# EAGLE board avoccado-nora2-test-jig-panel-50x50 (EAGLE 7.2.0)
Avoccado-avr-yolandi Yolandi is the minified version of Avoccado-avr with less pins broken out and a footprint of less than one square inch for the PCB without peripherals.
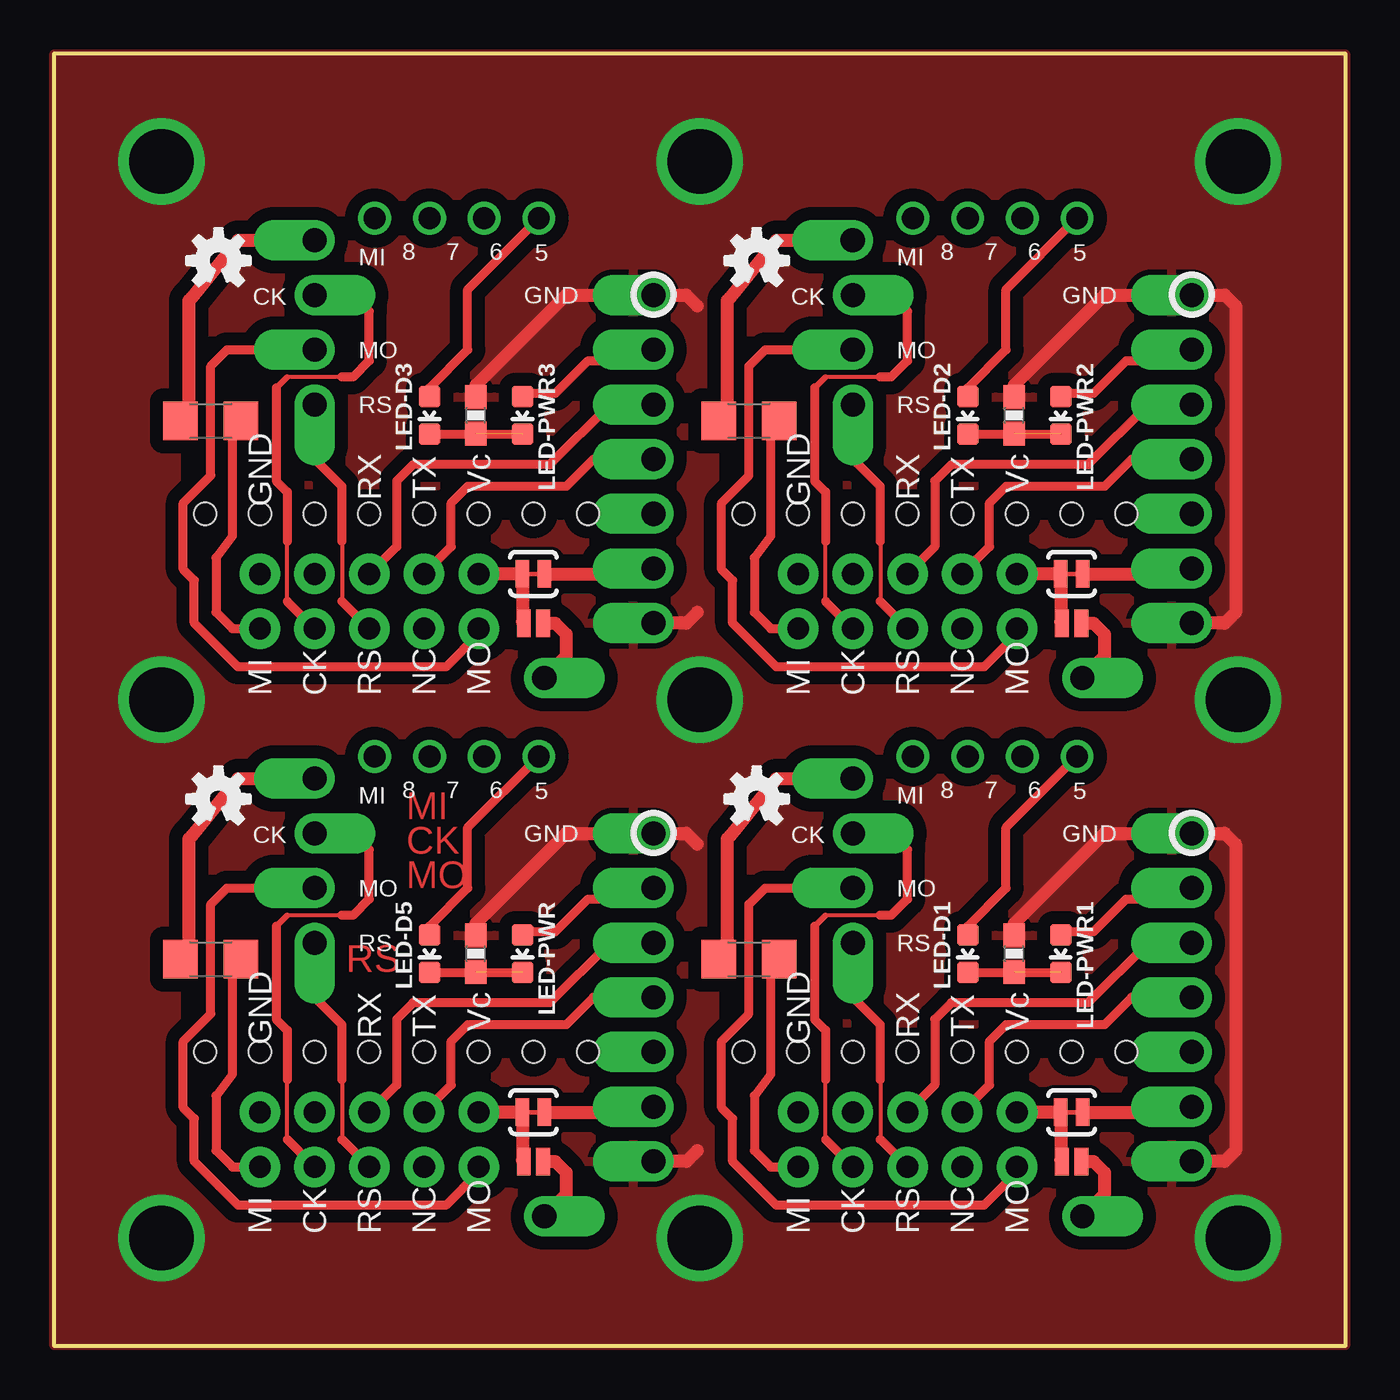
[diagram p0: board, top side]
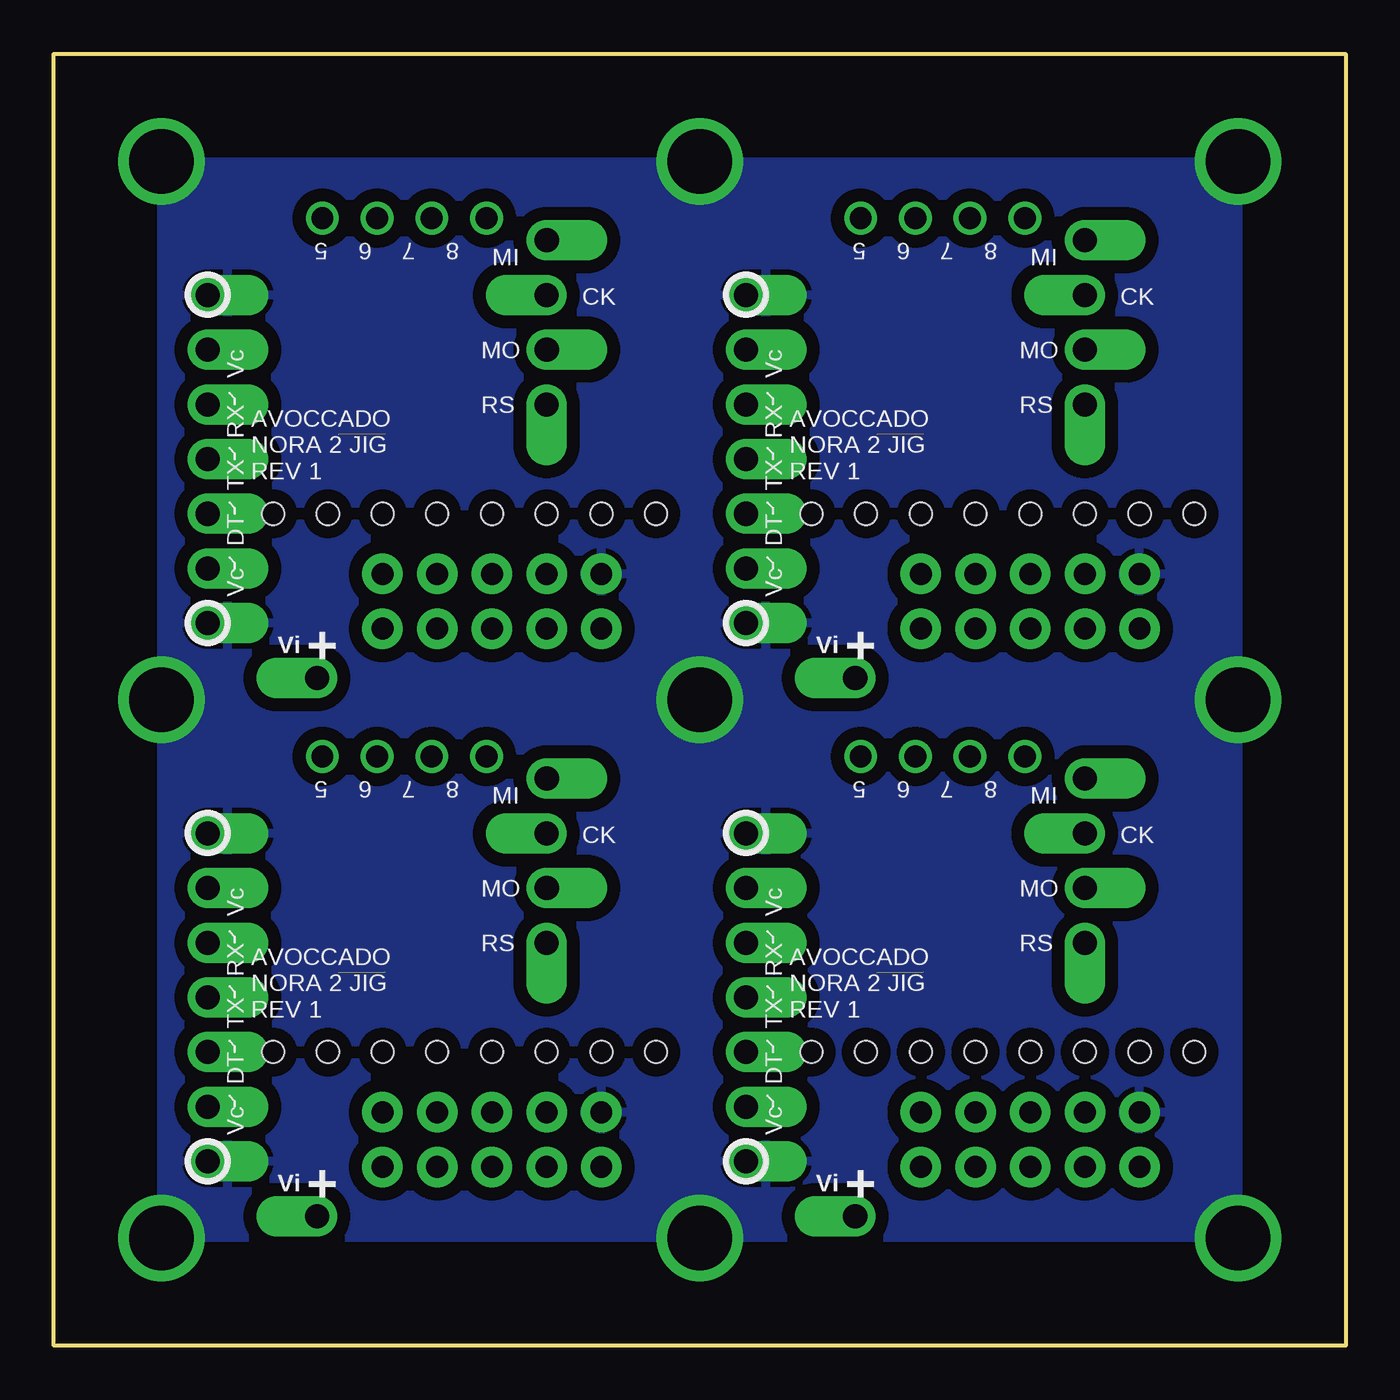
[diagram p1: board, bottom side, seen from below]

Size 60 x 60 mm. Coordinates in mm from the lower left corner, seen from the top.
Outline: 0,60 0,0 60,0 60,60 0,60
Copper layers (1*16): Top 0.035mm / dielectric 1.5mm / Bottom 0.035mm
Design rules "dirt_cheap_dirty_boards.v1 *": minimum track width 5mil, minimum drill 12mil, track to track 5mil, track to pad 5mil, pad to pad 5mil, via to via 5mil, smd to smd 0mil, copper to edge 0mil, drill to drill 10mil, minimum pad ring 10mil, minimum via ring 6mil, stop-mask expansion 0mil, vias tented up to drill 25mil, thermal gap 10mil
Net classes: 1 vcc: width 0.254 mm; 3 usbvcc: width 0.203 mm, drill 0.61 mm, clearance 0.152 mm
Holes 1.02 mm at 9.57,13.64 12.11,13.64 14.65,13.64 17.19,13.64 19.73,13.64 22.27,13.64 24.81,13.64 7.03,13.64 34.57,13.64 37.11,13.64 39.65,13.64 42.19,13.64 44.73,13.64 47.27,13.64 49.81,13.64 32.03,13.64 34.57,38.64 37.11,38.64 39.65,38.64 42.19,38.64 44.73,38.64 47.27,38.64 49.81,38.64 32.03,38.64 9.57,38.64 12.11,38.64 14.65,38.64 17.19,38.64 19.73,38.64 22.27,38.64 24.81,38.64 7.03,38.64
tRestrict: area 8,8 to 19.7,12.1; area 12.1,14.1 to 17.7,26.3; area 17.7,24.8 to 19.7,26.3; area 6.5,8.6 to 10.1,20.7; area 33,8 to 44.7,12.1; area 31.5,8.6 to 35.1,20.7; area 33,33 to 44.7,37.1; area 31.5,33.6 to 35.1,45.7; area 8,33 to 19.7,37.1; area 6.5,33.6 to 10.1,45.7

## Footprints (pad centres in the part's own frame; a part is rotated, then mirrored left to right if it is on the bottom)
2X5_NOSILK = drill 1.016 pad 1.88: 1 -1.27,5.08; 2 1.27,5.08; 3 -1.27,2.54; 4 1.27,2.54; 5 -1.27,0; 6 1.27,0; 7 -1.27,-2.54; 8 1.27,-2.54; 9 -1.27,-5.08; 10 1.27,-5.08
1X01_OFFSET = drill 1.118 pad 1.88 offset: 1 0,0
LED-0603 = smd 1 x 1: A 0,-0.877; C 0,0.877
1206 = smd 1.6 x 1.8: 1 -1.4,0; 2 1.4,0
0603-RES = smd 1.1 x 1: 1 -0.85,0; 2 0.85,0
PAD-JUMPER-2-NC_BY_TRACE_YES_SILK = smd 0.635 x 1.27: 1 -0.508,0; 2 0.508,0
PAD-JUMPER-2-NO_NO_SILK = smd 0.635 x 1.27: 1 -0.45,0; 2 0.45,0
1X01NS-KIT = drill 1.016 pad 1.524: 1 0,0

## Placement (x,y rotation side)
ICSP  M05X2NO_SILK  [2X5_NOSILK]  14.65,9.57 90 bottom
ICSP1  M05X2NO_SILK  [2X5_NOSILK]  39.65,9.57 90 bottom
ICSP2  M05X2NO_SILK  [2X5_NOSILK]  39.65,34.57 90 bottom
ICSP3  M05X2NO_SILK  [2X5_NOSILK]  14.65,34.57 90 bottom
JP1  M01OFFSET  [1X01_OFFSET]  27.86,8.56 90 top
JP2  M01OFFSET  [1X01_OFFSET]  27.86,18.72 90 top
JP3  M01OFFSET  [1X01_OFFSET]  37.1,26.34 90 top
JP4  M01OFFSET  [1X01_OFFSET]  27.86,16.18 90 top
JP5  M01OFFSET  [1X01_OFFSET]  27.86,13.64 90 top
JP6  M01OFFSET  [1X01_OFFSET]  37.12,23.8 270 top
JP7  M01OFFSET  [1X01_OFFSET]  27.86,21.26 90 top
JP8  M01OFFSET  [1X01_OFFSET]  37.1,21.26 90 top
JP9  M01OFFSET  [1X01_OFFSET]  37.11,18.71 180 top
JP10  M01OFFSET  [1X01_OFFSET]  52.86,8.56 90 top
JP11  M01OFFSET  [1X01_OFFSET]  52.86,18.72 90 top
JP12  M01OFFSET  [1X01_OFFSET]  12.1,26.34 90 top
JP13  M01OFFSET  [1X01_OFFSET]  12.12,23.8 270 top
JP14  M01OFFSET  [1X01_OFFSET]  12.1,21.26 90 top
JP15  M01OFFSET  [1X01_OFFSET]  12.11,18.71 180 top
JP16  M01OFFSET  [1X01_OFFSET]  22.78,6.02 270 top
JP17  M01OFFSET  [1X01_OFFSET]  52.86,16.18 90 top
JP18  M01OFFSET  [1X01_OFFSET]  52.86,13.64 90 top
JP19  M01OFFSET  [1X01_OFFSET]  27.86,11.1 90 top
JP20  M01OFFSET  [1X01_OFFSET]  27.86,23.8 90 top
JP21  M01OFFSET  [1X01_OFFSET]  52.86,21.26 90 top
JP22  M01OFFSET  [1X01_OFFSET]  47.78,6.02 270 top
JP23  M01OFFSET  [1X01_OFFSET]  52.86,11.1 90 top
JP24  M01OFFSET  [1X01_OFFSET]  52.86,23.8 90 top
JP25  M01OFFSET  [1X01_OFFSET]  37.1,51.34 90 top
JP26  M01OFFSET  [1X01_OFFSET]  37.12,48.8 270 top
JP27  M01OFFSET  [1X01_OFFSET]  37.1,46.26 90 top
JP28  M01OFFSET  [1X01_OFFSET]  37.11,43.71 180 top
JP29  M01OFFSET  [1X01_OFFSET]  52.86,33.56 90 top
JP30  M01OFFSET  [1X01_OFFSET]  52.86,43.72 90 top
JP31  M01OFFSET  [1X01_OFFSET]  52.86,41.18 90 top
JP32  M01OFFSET  [1X01_OFFSET]  52.86,38.64 90 top
JP33  M01OFFSET  [1X01_OFFSET]  52.86,46.26 90 top
JP34  M01OFFSET  [1X01_OFFSET]  47.78,31.02 270 top
JP35  M01OFFSET  [1X01_OFFSET]  52.86,36.1 90 top
JP36  M01OFFSET  [1X01_OFFSET]  52.86,48.8 90 top
JP37  M01OFFSET  [1X01_OFFSET]  12.1,51.34 90 top
JP38  M01OFFSET  [1X01_OFFSET]  12.12,48.8 270 top
JP39  M01OFFSET  [1X01_OFFSET]  12.1,46.26 90 top
JP40  M01OFFSET  [1X01_OFFSET]  12.11,43.71 180 top
JP41  M01OFFSET  [1X01_OFFSET]  27.86,33.56 90 top
JP42  M01OFFSET  [1X01_OFFSET]  27.86,43.72 90 top
JP43  M01OFFSET  [1X01_OFFSET]  27.86,41.18 90 top
JP44  M01OFFSET  [1X01_OFFSET]  27.86,38.64 90 top
JP45  M01OFFSET  [1X01_OFFSET]  27.86,46.26 90 top
JP46  M01OFFSET  [1X01_OFFSET]  22.78,31.02 270 top
JP47  M01OFFSET  [1X01_OFFSET]  27.86,36.1 90 top
JP48  M01OFFSET  [1X01_OFFSET]  27.86,48.8 90 top
LED-D1  [LED-0603]  42.45,18.21 180 top
LED-D2  [LED-0603]  42.45,43.21 180 top
LED-D3  [LED-0603]  17.45,43.21 180 top
LED-D5  [LED-0603]  17.45,18.21 180 top
LED-PWR  [LED-0603]  21.76,18.21 180 top
LED-PWR1  [LED-0603]  46.76,18.21 180 top
LED-PWR2  [LED-0603]  46.76,43.21 180 top
LED-PWR3  [LED-0603]  21.76,43.21 180 top
LOGO1  OSHW-LOGOS  [OSHW-LOGO-S]  32.65,25.39 0 top
LOGO2  OSHW-LOGOS  [OSHW-LOGO-S]  7.65,25.39 0 top
LOGO3  OSHW-LOGOS  [OSHW-LOGO-S]  32.65,50.39 0 top
LOGO4  OSHW-LOGOS  [OSHW-LOGO-S]  7.65,50.39 0 top
R1  0  [1206]  7.29,17.95 0 top
R2  1K  [0603-RES]  19.61,18.21 90 top
R3  0  [1206]  32.29,17.95 0 top
R4  1K  [0603-RES]  44.6,18.21 90 top
R5  0  [1206]  32.29,42.95 0 top
R6  1K  [0603-RES]  44.6,43.21 90 top
R7  0  [1206]  7.29,42.95 0 top
R8  1K  [0603-RES]  19.61,43.21 90 top
SJ1  JUMPER-PAD-2-NC_BY_TRACE  [PAD-JUMPER-2-NC_BY_TRACE_YES_SILK]  22.27,10.84 180 top
SJ2  JUMPER-PAD-2-NO  [PAD-JUMPER-2-NO_NO_SILK]  22.27,8.56 180 top
SJ3  JUMPER-PAD-2-NC_BY_TRACE  [PAD-JUMPER-2-NC_BY_TRACE_YES_SILK]  47.27,10.84 180 top
SJ4  JUMPER-PAD-2-NO  [PAD-JUMPER-2-NO_NO_SILK]  47.27,8.56 180 top
SJ5  JUMPER-PAD-2-NC_BY_TRACE  [PAD-JUMPER-2-NC_BY_TRACE_YES_SILK]  47.27,35.84 180 top
SJ6  JUMPER-PAD-2-NO  [PAD-JUMPER-2-NO_NO_SILK]  47.27,33.56 180 top
SJ7  JUMPER-PAD-2-NC_BY_TRACE  [PAD-JUMPER-2-NC_BY_TRACE_YES_SILK]  22.27,35.84 180 top
SJ8  JUMPER-PAD-2-NO  [PAD-JUMPER-2-NO_NO_SILK]  22.27,33.56 180 top
TP1  M01NOSILK-KIT  [1X01NS-KIT]  22.53,27.36 270 top
TP2  M01NOSILK-KIT  [1X01NS-KIT]  47.53,27.36 270 top
TP3  M01NOSILK-KIT  [1X01NS-KIT]  44.99,27.36 270 top
TP4  M01NOSILK-KIT  [1X01NS-KIT]  42.45,27.36 270 top
TP5  M01NOSILK-KIT  [1X01NS-KIT]  39.91,27.36 270 top
TP6  M01NOSILK-KIT  [1X01NS-KIT]  19.99,27.36 270 top
TP7  M01NOSILK-KIT  [1X01NS-KIT]  17.45,27.36 270 top
TP8  M01NOSILK-KIT  [1X01NS-KIT]  14.91,27.36 270 top
TP9  M01NOSILK-KIT  [1X01NS-KIT]  47.53,52.36 270 top
TP10  M01NOSILK-KIT  [1X01NS-KIT]  44.99,52.36 270 top
TP11  M01NOSILK-KIT  [1X01NS-KIT]  42.45,52.36 270 top
TP12  M01NOSILK-KIT  [1X01NS-KIT]  39.91,52.36 270 top
TP13  M01NOSILK-KIT  [1X01NS-KIT]  22.53,52.36 270 top
TP14  M01NOSILK-KIT  [1X01NS-KIT]  19.99,52.36 270 top
TP15  M01NOSILK-KIT  [1X01NS-KIT]  17.45,52.36 270 top
TP16  M01NOSILK-KIT  [1X01NS-KIT]  14.91,52.36 270 top

## Library data of the parts
ICSP ICSP1-ICSP3 JP1-JP48 TP1-TP16 = SparkFun-Connectors
LED-D1-LED-D3 LED-D5 LED-PWR LED-PWR1-LED-PWR3 = SparkFun-LED
LOGO1-LOGO4 = SparkFun-Aesthetics
R1 R3 R5 R7 SJ1-SJ8 = SparkFun-Passives
R2 R4 R6 R8 = SparkFun-Resistors

## Nets
3.3V: JP19.1 SJ1.1
3.3V1: JP23.1 SJ3.1
3.3V2: JP35.1 SJ5.1
3.3V3: JP47.1 SJ7.1
5V: JP16.1 SJ2.1
5V1: JP22.1 SJ4.1
5V2: JP34.1 SJ6.1
5V3: JP46.1 SJ8.1
D1: TP5.1
D2: LED-D1.A TP2.1
D3: TP3.1
D4: TP4.1
D5: LED-D5.A TP1.1
D6: TP6.1
D7: TP7.1
D8: TP8.1
D9: TP12.1
D10: LED-D2.A TP9.1
D11: TP10.1
D12: TP11.1
D13: TP16.1
D14: LED-D3.A TP13.1
D15: TP14.1
D16: TP15.1
DTR: JP5.1
DTR1: JP18.1
DTR2: JP32.1
DTR3: JP44.1
GND [vcc]: ICSP1.10 ICSP2.10 ICSP3.10 ICSP.10 JP1.1 JP10.1 JP20.1 JP24.1 JP29.1 JP36.1 JP41.1 JP48.1 R2.2 R4.2 R6.2 R8.2
MISO: JP12.1 R1.1
MISO1: ICSP.9 R1.2
MISO2: JP3.1 R3.1
MISO3: ICSP1.9 R3.2
MISO4: JP25.1 R5.1
MISO5: ICSP2.9 R5.2
MISO6: JP37.1 R7.1
MISO7: ICSP3.9 R7.2
MOSI: ICSP.1 JP14.1
MOSI1: ICSP1.1 JP8.1
MOSI2: ICSP2.1 JP27.1
MOSI3: ICSP3.1 JP39.1
N$1: LED-D5.C LED-PWR.C R2.1
N$2: JP7.1 LED-PWR.A
N$3: LED-D1.C LED-PWR1.C R4.1
N$4: JP21.1 LED-PWR1.A
N$5: LED-D2.C LED-PWR2.C R6.1
N$6: JP33.1 LED-PWR2.A
N$7: LED-D3.C LED-PWR3.C R8.1
N$8: JP45.1 LED-PWR3.A
RESET: ICSP.5 JP15.1
RESET1: ICSP1.5 JP9.1
RESET2: ICSP2.5 JP28.1
RESET3: ICSP3.5 JP40.1
RXI: ICSP.6 JP2.1
RXI1: ICSP1.6 JP11.1
RXI2: ICSP2.6 JP30.1
RXI3: ICSP3.6 JP42.1
SCK: ICSP.7 JP13.1
SCK1: ICSP1.7 JP6.1
SCK2: ICSP2.7 JP26.1
SCK3: ICSP3.7 JP38.1
TXO: ICSP.4 JP4.1
TXO1: ICSP1.4 JP17.1
TXO2: ICSP2.4 JP31.1
TXO3: ICSP3.4 JP43.1
VTG: ICSP.2 SJ1.2 SJ2.2
VTG1: ICSP1.2 SJ3.2 SJ4.2
VTG2: ICSP2.2 SJ5.2 SJ6.2
VTG3: ICSP3.2 SJ7.2 SJ8.2

## Tracks (layer width: path | path; a pad name or v marks a point on that pad's centre or on a via)
3.3V
  Top 0.406: 27.6,10.84 27.61,10.84 JP19.1
  Top 0.61: SJ1.1 27.6,10.84
3.3V1
  Top 0.406: 52.6,10.84 52.61,10.84 JP23.1
  Top 0.61: SJ3.1 52.6,10.84
3.3V2
  Top 0.406: 52.6,35.84 52.61,35.84 JP35.1
  Top 0.61: SJ5.1 52.6,35.84
3.3V3
  Top 0.406: 27.6,35.84 27.61,35.84 JP47.1
  Top 0.61: SJ7.1 27.6,35.84
5V
  Top 0.406: 23.28,6.52 JP16.1
  Top 0.61: SJ2.1 23.29,8.56 23.8,8.05 23.8,7.03 23.29,6.52 23.28,6.52
5V1
  Top 0.406: 48.28,6.52 JP22.1
  Top 0.61: SJ4.1 48.29,8.56 48.8,8.05 48.8,7.03 48.29,6.52 48.28,6.52
5V2
  Top 0.406: 48.28,31.52 JP34.1
  Top 0.61: SJ6.1 48.29,33.56 48.8,33.05 48.8,32.03 48.29,31.52 48.28,31.52
5V3
  Top 0.406: 23.28,31.52 JP46.1
  Top 0.61: SJ8.1 23.29,33.56 23.8,33.05 23.8,32.03 23.29,31.52 23.28,31.52
D2
  Top 0.406: TP2.1 44.22,24.06 44.22,21.26 42.45,19.48 LED-D1.A
D5
  Top 0.406: TP1.1 19.22,24.06 19.22,21.26 17.45,19.48 LED-D5.A
D10
  Top 0.406: TP9.1 44.22,49.06 44.22,46.26 42.45,44.48 LED-D2.A
D14
  Top 0.406: TP13.1 19.22,49.06 19.22,46.26 17.45,44.48 LED-D3.A
GND  (via drill 3 pad 4)
  Top 0.406: JP20.1 | JP48.1 | JP36.1 | JP24.1
  Top 0.61: R2.2 19.61,19.61 23.8,23.8 JP20.1 29.38,23.8 29.89,23.29 | 29.89,9.06 29.38,8.56 JP1.1 | R8.2 19.61,44.6 23.8,48.8 JP48.1 29.38,48.8 29.89,48.29 | 29.89,34.06 29.38,33.56 JP41.1 | R6.2 44.6,44.6 48.8,48.8 JP36.1 54.38,48.8 54.89,48.29 54.89,34.06 54.38,33.56 JP29.1 | R4.2 44.6,19.61 48.8,23.8 JP24.1 54.38,23.8 54.89,23.29 54.89,9.06 54.38,8.56 JP10.1
  other vias: 30,30 30,55 55,55 55,30 5,55 5,30 5,5 30,5 55,5
  pour Bottom (isolate 0.61): 5.4,28.02 26,28 27.5,26.5 27.5,6 5.4,6
  pour Top (isolate 0.61): 0,0 0,60 60,60 60,0
  pour Bottom (isolate 0.61): 55,5 55,55 5,55 5,5
MISO
  Top 0.61: JP12.1 8.56,26.34 6.39,23.67 6.27,23.54 6.27,18.72 5.89,18.33 R1.1
MISO1
  Top 0.406: ICSP.9 8.3,8.3 7.54,9.06 7.54,11.6 8.3,12.62 8.3,17.45 R1.2
MISO2
  Top 0.61: JP3.1 33.56,26.34 31.39,23.67 31.27,23.54 31.27,18.72 30.89,18.33 R3.1
MISO3
  Top 0.406: ICSP1.9 33.3,8.3 32.54,9.06 32.54,11.6 33.3,12.62 33.3,17.45 R3.2
MISO4
  Top 0.61: JP25.1 33.56,51.34 31.39,48.67 31.27,48.54 31.27,43.72 30.89,43.33 R5.1
MISO5
  Top 0.406: ICSP2.9 33.3,33.3 32.54,34.06 32.54,36.6 33.3,37.62 33.3,42.45 R5.2
MISO6
  Top 0.61: JP37.1 8.56,51.34 6.39,48.67 6.27,48.54 6.27,43.72 5.89,43.33 R7.1
MISO7
  Top 0.406: ICSP3.9 8.3,33.3 7.54,34.06 7.54,36.6 8.3,37.62 8.3,42.45 R7.2
MOSI
  Top 0.406: ICSP.1 19.73,8.05 18.21,6.52 8.56,6.52 6.52,8.56 6.52,10.54 6.02,11.05 6.02,14.14 7.29,15.41 7.29,20.49 8.05,21.26 JP14.1
MOSI1
  Top 0.406: ICSP1.1 44.73,8.05 43.21,6.52 33.56,6.52 31.52,8.56 31.52,10.54 31.02,11.05 31.02,14.14 32.29,15.41 32.29,20.49 33.05,21.26 JP8.1
MOSI2
  Top 0.406: ICSP2.1 44.73,33.05 43.21,31.52 33.56,31.52 31.52,33.56 31.52,35.54 31.02,36.05 31.02,39.14 32.29,40.41 32.29,45.49 33.05,46.26 JP27.1
MOSI3
  Top 0.406: ICSP3.1 19.73,33.05 18.21,31.52 8.56,31.52 6.52,33.56 6.52,35.54 6.02,36.05 6.02,39.14 7.29,40.41 7.29,45.49 8.05,46.26 JP39.1
N$1  (1 unrouted)
  Top 0.406: LED-D5.C LED-PWR.C
N$2
  Top 0.406: JP7.1 27.35,20.75 24.81,20.75 23.29,19.22 21.9,19.22 LED-PWR.A
N$3  (1 unrouted)
  Top 0.406: LED-D1.C LED-PWR1.C
N$4
  Top 0.406: JP21.1 52.35,20.75 49.81,20.75 48.29,19.22 46.9,19.22 LED-PWR1.A
N$5  (1 unrouted)
  Top 0.406: LED-D2.C LED-PWR2.C
N$6
  Top 0.406: JP33.1 52.35,45.75 49.81,45.75 48.29,44.22 46.9,44.22 LED-PWR2.A
N$7  (1 unrouted)
  Top 0.406: LED-D3.C LED-PWR3.C
N$8
  Top 0.406: JP45.1 27.35,45.75 24.81,45.75 23.29,44.22 21.9,44.22 LED-PWR3.A
RESET
  Top 0.19: 13.38,12.37 13.38,9.57
  Top 0.305: JP15.1
  Top 0.406: 13.38,9.57 ICSP.5 | 13.38,12.37 13.38,14.91 12.11,16.18 JP15.1
RESET1
  Top 0.19: 38.38,12.37 38.38,9.57
  Top 0.305: JP9.1
  Top 0.406: 38.38,9.57 ICSP1.5 | 38.38,12.37 38.38,14.91 37.11,16.18 JP9.1
RESET2
  Top 0.19: 38.38,37.37 38.38,34.57
  Top 0.305: JP28.1
  Top 0.406: 38.38,34.57 ICSP2.5 | 38.38,37.37 38.38,39.91 37.11,41.18 JP28.1
RESET3
  Top 0.19: 13.38,37.37 13.38,34.57
  Top 0.305: JP40.1
  Top 0.406: 13.38,34.57 ICSP3.5 | 13.38,37.37 13.38,39.91 12.11,41.18 JP40.1
RXI
  Top 0.406: JP2.1 25.83,18.72 23.03,15.92 16.68,15.92 15.92,15.16 15.92,12.11 ICSP.6
RXI1
  Top 0.406: JP11.1 50.83,18.72 48.03,15.92 41.68,15.92 40.92,15.16 40.92,12.11 ICSP1.6
RXI2
  Top 0.406: JP30.1 50.83,43.72 48.03,40.92 41.68,40.92 40.92,40.16 40.92,37.11 ICSP2.6
RXI3
  Top 0.406: JP42.1 25.83,43.72 23.03,40.92 16.68,40.92 15.92,40.16 15.92,37.11 ICSP3.6
SCK
  Top 0.19: 10.84,9.57 10.84,12.37 | 13.38,19.99 10.84,19.99
  Top 0.254: 10.84,19.99 10.33,19.48
  Top 0.406: 10.84,9.57 ICSP.7 | JP13.1 13.89,23.8 14.65,23.03 14.65,20.75 13.89,19.99 13.38,19.99 | 10.33,19.48 10.33,15.16 10.84,14.65 10.84,12.37
SCK1
  Top 0.19: 35.84,9.57 35.84,12.37 | 38.38,19.99 35.84,19.99
  Top 0.254: 35.84,19.99 35.33,19.48
  Top 0.406: 35.84,9.57 ICSP1.7 | JP6.1 38.89,23.8 39.65,23.03 39.65,20.75 38.89,19.99 38.38,19.99 | 35.33,19.48 35.33,15.16 35.84,14.65 35.84,12.37
SCK2
  Top 0.19: 35.84,34.57 35.84,37.37 | 38.38,44.99 35.84,44.99
  Top 0.254: 35.84,44.99 35.33,44.48
  Top 0.406: 35.84,34.57 ICSP2.7 | JP26.1 38.89,48.8 39.65,48.03 39.65,45.75 38.89,44.99 38.38,44.99 | 35.33,44.48 35.33,40.16 35.84,39.65 35.84,37.37
SCK3
  Top 0.19: 10.84,34.57 10.84,37.37 | 13.38,44.99 10.84,44.99
  Top 0.254: 10.84,44.99 10.33,44.48
  Top 0.406: 10.84,34.57 ICSP3.7 | JP38.1 13.89,48.8 14.65,48.03 14.65,45.75 13.89,44.99 13.38,44.99 | 10.33,44.48 10.33,40.16 10.84,39.65 10.84,37.37
TXO
  Top 0.406: ICSP.4 18.46,12.11 18.46,14.14 19.22,14.91 23.8,14.91 25.07,16.18 JP4.1
TXO1
  Top 0.406: ICSP1.4 43.46,12.11 43.46,14.14 44.22,14.91 48.8,14.91 50.07,16.18 JP17.1
TXO2
  Top 0.406: ICSP2.4 43.46,37.11 43.46,39.14 44.22,39.91 48.8,39.91 50.07,41.18 JP31.1
TXO3
  Top 0.406: ICSP3.4 18.46,37.11 18.46,39.14 19.22,39.91 23.8,39.91 25.07,41.18 JP43.1
VTG
  Top 0.61: SJ2.2 21.76,8.61 SJ1.2 ICSP.2
VTG1
  Top 0.61: SJ4.2 46.76,8.61 SJ3.2 ICSP1.2
VTG2
  Top 0.61: SJ6.2 46.76,33.61 SJ5.2 ICSP2.2
VTG3
  Top 0.61: SJ8.2 21.76,33.61 SJ7.2 ICSP3.2

## Text on the board
Top: MI | CK | MO | RS
tPlace: MI | 8 | 7 | 6 | 5 | MI | 8 | 7 | 6 | 5 | CK | GND | CK | GND | MO | MO | RS | RS | GND | GND | RX | TX | Vc | RX | TX | Vc | MI | CK | RS | NC | MO | MI | CK | RS | NC | MO | MI | 8 | 7 | 6 | 5 | MI | 8 | 7 | 6 | 5 | CK | GND | CK | GND | MO | MO | RS | RS | GND | GND | RX | TX | Vc | RX | TX | Vc | MI | CK | RS | NC | MO | MI | CK | RS | NC | MO
bPlace: MI | 8 | 7 | 6 | 5 | MI | 8 | 7 | 6 | 5 | CK | CK | MO | Vc | MO | Vc | RS | RX | RS | RX | AVOCCADO / NORA 2 JIG / REV 1 | AVOCCADO / NORA 2 JIG / REV 1 | TX | TX | DT | DT | Vc | Vc | + | Vi | + | Vi | MI | 8 | 7 | 6 | 5 | MI | 8 | 7 | 6 | 5 | CK | CK | MO | Vc | MO | Vc | RS | RX | RS | RX | AVOCCADO / NORA 2 JIG / REV 1 | AVOCCADO / NORA 2 JIG / REV 1 | TX | TX | DT | DT | Vc | Vc | + | Vi | + | Vi